# Altium PCB TxPower.PcbDoc
Units mil, origin at the board's own origin, x right, y up, seen from the top; angles counter-clockwise.
Board outline 3750 x 1650 mil, 2 copper layers (Top Layer, Bottom Layer); 31 components, 32 nets, 105 pads, 8 vias.
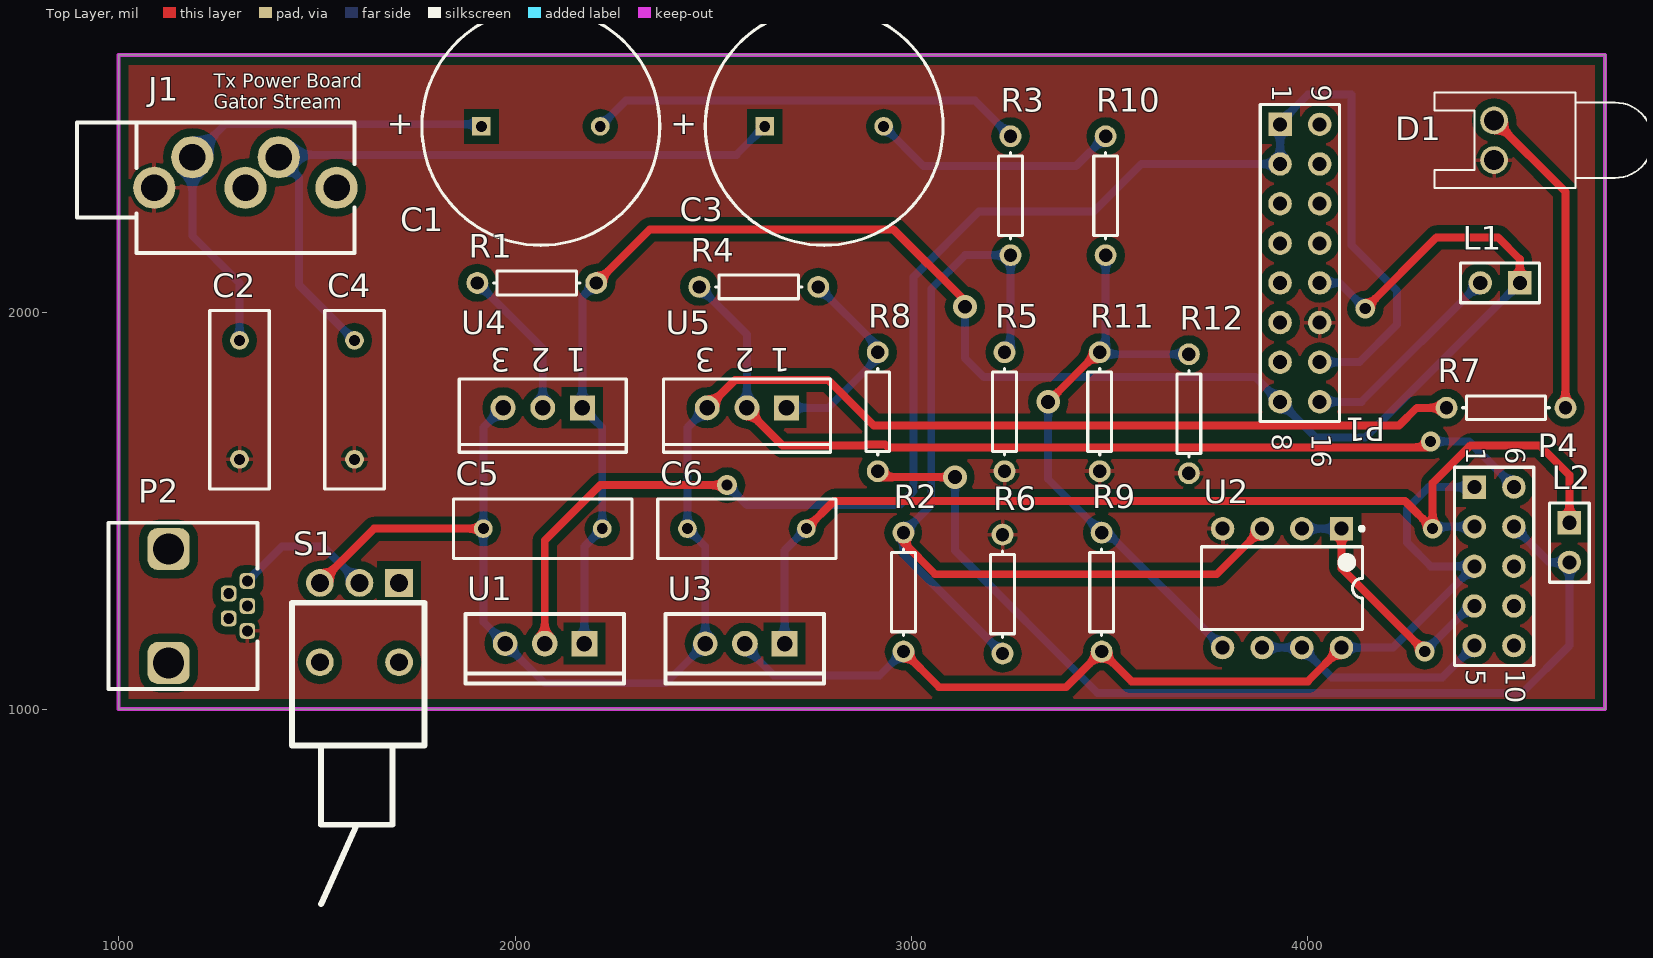
[diagram p0: Top Layer view]
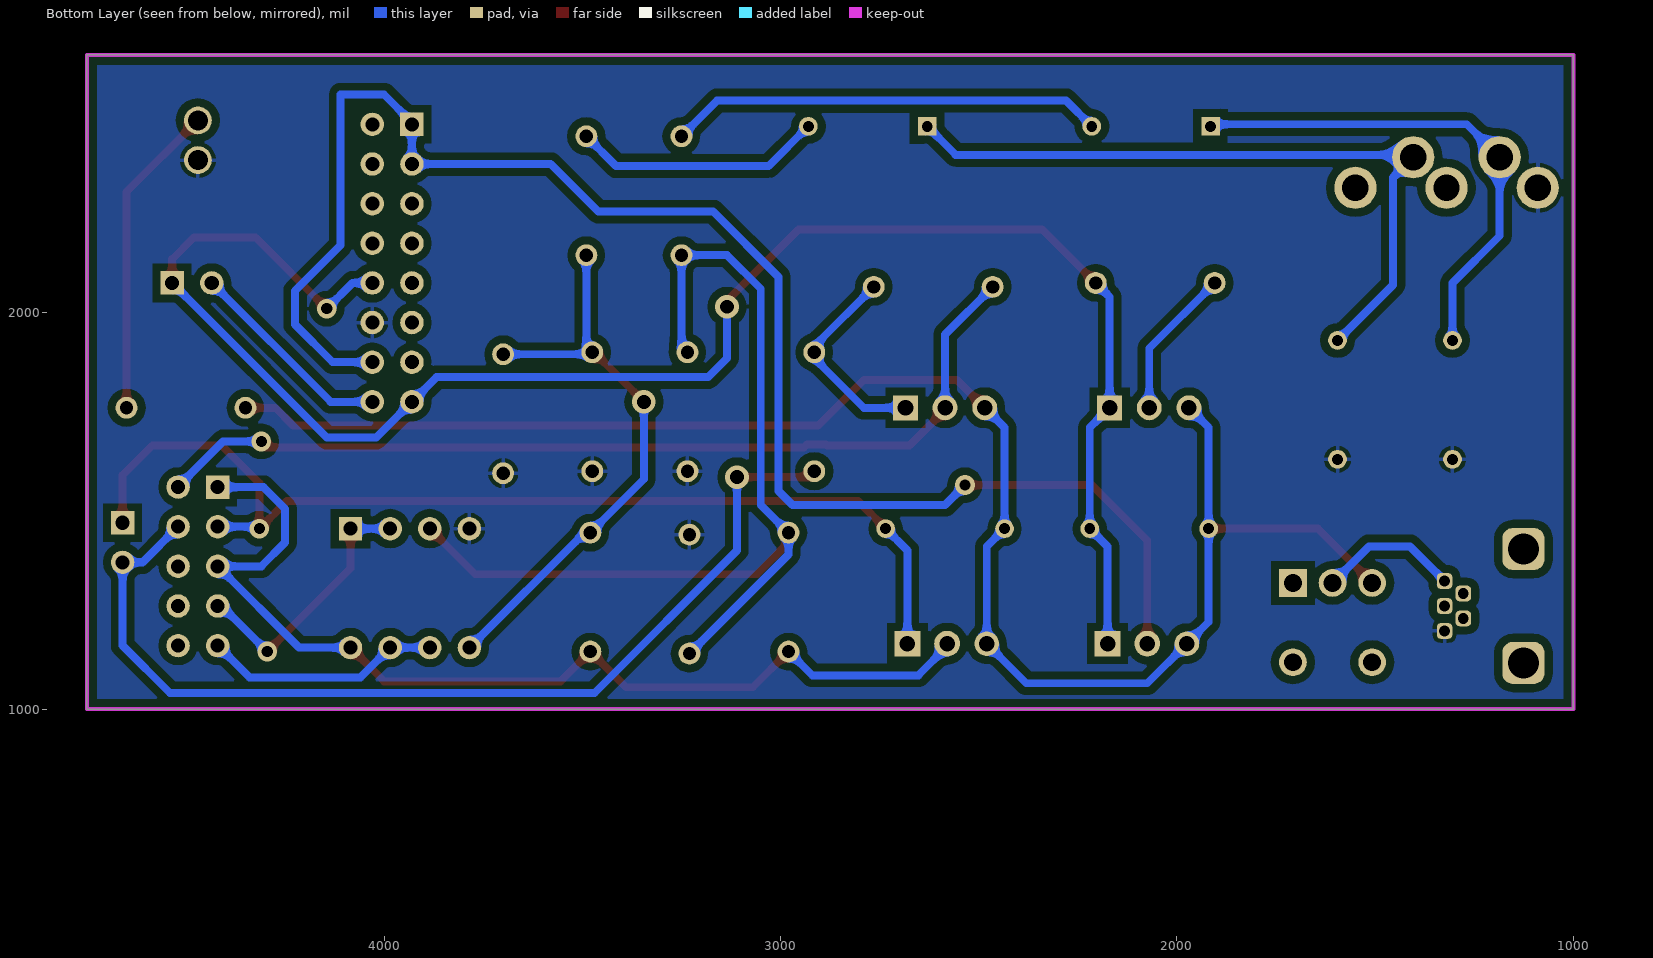
[diagram p1: Bottom Layer view, seen from below]

## Layer stack, top to bottom
Top Solder: solder mask 0.4, Solder Resist, Dk 3.5
Top Layer: signal copper 1.4
Dielectric 1: dielectric 12.6, FR-4, Dk 4.8
Bottom Layer: signal copper 1.4
Bottom Solder: solder mask 0.4, Solder Resist, Dk 3.5

## Board outline
1000,1000 1000,2650 4750,2650 4750,1000

## Design rules (kind name [scope] priority, off if disabled: settings)
Clearance [All] p1: gap=20
PolygonConnect [All] p1: connectstyle=Relief reliefconductorwidth=10 reliefentries=4 polygonreliefangle="90 Angle" airgapwidth=10
RoutingVias [All] p1: holewidth=28 width=50 viastyle="Through Hole" minholewidth=28 minwidth=50 maxholewidth=28 maxwidth=50
SolderMaskExpansion [All] p1: expansion=4
Width [All] p1: maxlimit=20 minlimit=20 preferedwidth=20
30 further rules are at their usual default settings.

## Components (designator, comment, footprint, x,y, rotation, side; value= is the part's Value field where it differs from the comment)
C1 "Cap Pol1" RB7.6-15 2065,2470 r180 top
C2 "Cap" RAD-0.3 1305,1780 r90 top
C3 "Cap Pol1" RB7.6-15 2780,2470 r180 top
C4 "Cap" RAD-0.3 1595,1780 r90 top
C5 "Cap" RAD-0.3 2070,1455 r180 top
C6 "Cap" RAD-0.3 2585,1455 r180 top
D1 "LED0" LED-0 4470,2435 r90 top
J1 "3.5mm jack GM" "3.5mm jack GM" 1090,2315 r270 top
L1 "Inductor" HDR1X2 4535,2075 r180 top
L2 "Inductor" HDR1X2 4660,1470 r270 top
P1 "Header 8X2A" HDR2X8_CEN 3930,2475 r270 top
P2 "USB B mini TH" "USB B mini Molex" 1325,1260 r90 top
P4 "Header 5X2A" HDR2X5_CEN 4420,1560 r270 top
R1 "Res1" AXIAL-0.3 2055,2075 r0 top
R2 "Res1" AXIAL-0.3 2980,1295 r270 top
R3 "Res1" AXIAL-0.3 3250,2295 r270 top
R4 "Res1" AXIAL-0.3 2615,2065 r180 top
R5 "Res1" AXIAL-0.3 3235,1750 r90 top
R6 "Res1" AXIAL-0.3 3230,1290 r270 top
R7 "Res1" AXIAL-0.3 4500,1760 r180 top
R8 "Res1" AXIAL-0.3 2915,1750 r90 top
R9 "Res1" AXIAL-0.3 3480,1295 r270 top
R10 "Res1" AXIAL-0.3 3490,2295 r270 top
R11 "Res1" AXIAL-0.3 3475,1750 r90 top
R12 "Res1" AXIAL-0.3 3700,1745 r90 top
S1 "SW-SPDT" "SW DPST jameco" 1610,1320 r0 top
U1 "LT1086  3.3V" TO-220 1975,1165 r180 top
U2 "LT1632CN8" DIP-8 3935,1305 r270 top
U3 "LT1086  3.3V" TO-220 2480,1165 r180 top
U4 "LM317KC" KC03 2070,1760 r180 top
U5 "LM317KC" KC03 2585,1760 r180 top

## Footprints (in the part's own frame and the unit in brackets; to place one, negate y for a bottom-side part, rotate by r counter-clockwise, add the part's x,y. Pads: shape width x height; smd on the part's side, far side on the other; paste and mask are expansions set on the pad)
"3.5mm jack GM" [mil]
  round 106.5 hole 66.5: 1(0,0) 2(-77,96) 3(0,230) 4(-77,314) 5(0,460)
  silkscreen extent -165,-195 165,505
AXIAL-0.3 [mm] "Axial Device, Thru-Hole; 2 Leads; 0.3 in Pin Spacing"
  round 1.4 hole 0.85: 1(-3.81,0) 2(3.81,0)
  silkscreen extent -2.77,-0.76 2.77,0.76
DIP-8 [mm] "DIP; 8 Leads; Row Spacing 7.62 mm; Pitch 2.54 mm"
  rect 1.5x1.5 hole 0.9: 1(-3.81,3.81)
  round 1.5 hole 0.9: 2(-3.81,1.27) 3(-3.81,-1.27) 4(-3.81,-3.81) 5(3.81,-3.81) 6(3.81,-1.27) 7(3.81,1.27) 8(3.81,3.81)
  silkscreen extent -3.93,-5.15 2.65,5.24, body extent -3.6,-5.15 3.6,5.15, height 5.08
HDR1X2 [mm] "Connector; Header; 2 Position"
  rect 1.5x1.5 hole 0.9: 1(0,0)
  round 1.5 hole 0.9: 2(2.54,0)
  silkscreen extent -1.27,-1.27 3.81,1.27
HDR2X5_CEN [mm] "Connector; Header; 5x2 Position"
  rect 1.5x1.5 hole 0.9: 1(0,0)
  round 1.5 hole 0.9: 2(2.54,0) 3(5.08,0) 4(7.62,0) 5(10.16,0) 6(0,2.54) 7(2.54,2.54) 8(5.08,2.54) 9(7.62,2.54) 10(10.16,2.54)
  silkscreen extent -1.27,-1.27 11.43,3.81
HDR2X8_CEN [mm] "Connector; Header; 8x2 Position"
  rect 1.5x1.5 hole 0.9: 1(0,0)
  round 1.5 hole 0.9: 2(2.54,0) 3(5.08,0) 4(7.62,0) 5(10.16,0) 6(12.7,0) 7(15.24,0) 8(17.78,0) 9(0,2.54) 10(2.54,2.54) 11(5.08,2.54) 12(7.62,2.54) 13(10.16,2.54) 14(12.7,2.54) 15(15.24,2.54) 16(17.78,2.54)
  silkscreen extent -1.27,-1.27 19.05,3.81
KC03 [mm] "TO, Thru-Hole, Vertical, Heatsink Mounted; 3 In-Line Leads; Pitch 2.54 mm"
  rect 1.6x1.6 hole 1: 1(-2.54,0)
  round 1.6 hole 1: 2(0,0) 3(2.54,0)
  silkscreen extent -5.35,-1.85 5.35,2.85
LED-0 [mil] "LED; 2 Leads"
  round 70 hole 50: 1(50,0) 2(-50,0)
  silkscreen extent -120,-400 120,150
RAD-0.3 [mm] "Radial Cap, Thru-Hole; 2 Leads; 0.3 in Pin Spacing"
  round 1.2 hole 0.7: 1(-3.81,0) 2(3.81,0)
  silkscreen extent -5.71,-1.91 5.71,1.91
RB7.6-15 [mm] "Polarized Capacitor (Radial); 2 Leads"
  rect 1.2x1.2 hole 0.7: 1(3.81,0)
  round 1.2 hole 0.7: 2(-3.81,0)
  silkscreen extent -7.62,-7.62 7.62,7.62
"SW DPST jameco" [mil]
  rect 70x70 hole 45: 1(97.64,-1.89)
  round 70 hole 45: 2(-2.36,-1.89) 3(-102.36,-1.89) 4(-102.36,-201.89) 5(97.64,-201.89)
  silkscreen extent -172,-812 162,-52
TO-220 [mil]
  rect 65x65 hole 39.4: 1(-200,0)
  round 65 hole 39.4: 2(-100,0)
  round 62 hole 39.4: 3(0,0)
  silkscreen extent -300,-75 100,100
"USB B mini Molex" [mm]
  rrect50% 2.7x2.7 hole 2: 0(-3.65,5.05) 0(3.65,5.05)
  rrect50% 1x1 hole 0.7: 1(1.6,0) 2(0.8,1.2) 3(0,0) 4(-1.6,0) 5(-0.8,1.2)
  silkscreen extent -5.33,-0.64 5.33,8.89

## Part data
C1 C3: "Polarized Capacitor (Radial)"
C2 C4 C5 C6: "Capacitor"
D1: "Typical INFRARED GaAs LED"
P1: "Header, 8-Pin, Dual row"
P4: "Header, 5-Pin, Dual row"
R1 R2 R3 R4 R5 R6 R7 R8 R9 R10 R11 R12: "Resistor"
S1: "SPDT Subminiature Toggle Switch, Right Angle Mounting, Vertical Actuation"
U2: "45MHz, 45V/µs, Dual Rail-to-Rail Input and Output Precision Operational Amplifier"
U4 U5: "3-Terminal Adjustable Regulator"

## Via types
v1: diameter 50, hole 28, Top Layer to Bottom Layer, 5 vias
v2: diameter 60, hole 35, Top Layer to Bottom Layer, 3 vias

## Nets (pads, with @x,y where several pads share a name; then routed paths per layer and width w, separated by ;. In a path a pad name is that pad's centre, name@x,y a point inside that pad or via, vN(x,y) a via of type N, cw(c..) or ccw(c..) an arc to the next point about the centre after c; other vN are vias at no path point)
5V: P2.1 S1.2 | length 356.7
  Bottom Layer w20: P2.1 1412.01,1410 1515.75,1410 S1.2
ADC_AVDD: P4.1 P4.3 R2.2 R9.2 U2.8 U3.2 | length 2600.7
  Top Layer w20: R2.2 3070,1055 3390,1055 R9.2 3555,1070 4000,1070 U2.8
  Bottom Layer w20: U3.2 2580,1157.57 2652.57,1085 2920,1085 R2.2 ; U2.8 4215,1155 P4.3 4310,1360 4250,1420 4250,1505 4305,1560 P4.1
ADC_DVDD: P4.6 R4.2 U5.2 | length 2391.1
  Top Layer w20: U5.2 2585,1754.58 2674.58,1665 2883.6,1665 2886.16,1667.56 2933.84,1667.56 2941.4,1660 4295,1660 v1(4310,1675)
  Bottom Layer w20: R4.2 2585,1945 U5.2 ; v1(4310,1675) 4406.48,1675 4520,1561.48 P4.6
ADC_GPIO: P4.8
ADC_MCLK: P4.9
AUDIO_L: P4.4 U2.1 U2.2 | length 683.8
  Top Layer w20: U2.1 4085,1355 v1(4295,1145)
  Bottom Layer w20: U2.2 U2.1 U2.1@4075,1465 ; v1(4295,1145) 4410,1260 P4.4
AUDIO_R: P4.5 U2.6 U2.7 | length 599.2
  Bottom Layer w20: U2.6 U2.7 4060,1080 4340,1080 P4.5
AVSS: C6.1 L2.1 P4.2 U3.1 | length 2708.3
  Top Layer w20: C6.1 2805,1525 4245,1525 v1(4315,1455) 4315,1570 4410,1665 4585,1665 4660,1590 L2.1
  Bottom Layer w20: U3.1 2680,1400 C6.1 ; v1(4315,1455) 4320,1460 P4.2
DSC_SD_CS: P1.12
DSC_SD_DIN: P1.7
DSC_SD_DOUT: P1.10
DSC_SD_PRESENT: P1.11
DSC_SD_SCLK: P1.9
DVSS: L2.2 P4.7 R8.1 | length 2522.3
  Top Layer w20: R8.1 2930,1585 v2(3110,1585)
  Bottom Layer w20: v2(3110,1585) 3110,1400 3470,1040 4540,1040 4660,1160 L2.2 4610,1370 P4.7
GND: C2.1 C4.1 D1.2 J1.1 P1.14 P2.4 R5.1 R6.1 R11.1 R12.1 U2.4
NetC1_1: C1.1 C2.2 J1.2 | length 1276.9
  Bottom Layer w20: C2.2 1305,2075 1186,2194 J1.2 1269.25,2475.25 1909.75,2475.25 C1.1
NetC1_2: C1.2 R3.1 | length 1099.2
  Bottom Layer w20: C1.2 2280,2535 3160,2535 R3.1
NetC3_1: C3.1 C4.2 J1.4 | length 1803.1
  Bottom Layer w20: C4.2 1455,2070 1455,2341 J1.4 1404,2398.25 2558.25,2398.25 C3.1
NetC3_2: C3.2 R10.1 | length 632.5
  Bottom Layer w20: C3.2 3030,2370 3415,2370 R10.1
NetD1_1: D1.1 R7.1 | length 799.6
  Top Layer w20: D1.1 4650,2305 R7.1
NetR1_1: R1.1 U4.2 | length 383.3
  Bottom Layer w20: R1.1 2070,1910 U4.2
NetR2_1: R2.1 R3.2 R5.2 R6.2 U2.3 | length 2549.7
  Top Layer w20: R2.1 2980,1420 3060,1340 3770,1340 U2.3
  Bottom Layer w20: R6.2 2980,1390 R2.1 3050,1515 3050,2060 3135,2145 R3.2 3250,1915 R5.2
NetR4_1: R4.1 R8.2 U5.1 | length 519.8
  Bottom Layer w20: U5.1 2790,1760 2910,1880 2910,1920 R4.1
NetR9_1: R9.1 R10.2 R11.2 R12.2 U2.5 | length 1464
  Top Layer w20: v2(3345,1775) 3470,1900 R11.2
  Bottom Layer w20: v2(3345,1775) 3345,1580 R9.1 3495,1445 U2.5 ; R11.2 3490,1915 R10.2 ; R11.2@3480,1895 R12.2
TMS_GND: C5.1 L1.1 P1.8 P1.13 R1.2 U1.1 U4.1 | length 4503
  Top Layer w20: R1.2 2340,2210 2955,2210 3135,2030 v2(3135,2015) ; v1(4145,2010) 4325,2190 4480,2190 4535,2135 L1.1
  Bottom Layer w20: U1.1 2175,1410 C5.1 2220,1710 U4.1 2170,2040 R1.2 ; v2(3135,2015) 3135,1885 3182.56,1837.44 3867.56,1837.44 P1.8 4020,1685 4145,1685 L1.1 ; P1.13 4080,2075 v1(4145,2010)
TMS_VDDA: P1.1 P1.2 P1.15 U1.2 | length 4042.2
  Top Layer w20: U1.2 2075,1425 2215,1565 v1(2535,1565)
  Bottom Layer w20: v1(2535,1565) 2585,1515 2970,1515 3005,1550 3005,2090 3170,2255 3460,2255 3580,2375 P1.2 P1.1 3930,2480 4000,2550 4110,2550 4110,2170 4225,2055 4225,1970 4130,1875 P1.15
TMS_VSSA: L1.2 P1.16 | length 529.3
  Bottom Layer w20: P1.16 4135,1775 L1.2
UART_DSC_MSP_IN: P1.6
UART_DSC_MSP_OUT: P1.5
UART_DSC_XBEE_IN: P1.4
UART_DSC_XBEE_OUT: P1.3
VCC: C5.2 C6.2 R7.2 S1.3 U1.3 U3.3 U4.3 U5.3 | length 4290
  Top Layer w20: S1.3 1644.53,1455 C5.2 ; U5.3 2555,1830 2790,1830 2905,1715 4230,1715 4275,1760 R7.2
  Bottom Layer w20: U4.3 1920,1710 C5.2 1920,1220 U1.3 2075,1065 2380,1065 U3.3 2480,1410 C6.2 2435,1710 U5.3
pads on no net: J1.3 J1.5 P2.0 P2.2 P2.3 P2.5 P4.10 S1.1 S1.4 S1.5

## Polygon pours and split planes (outlines as drawn)
GND on Bottom Layer "Bottom Layer-GND" (solid, pour order 4): 1000,1000 1000,2650 4750,2650 4750,1000
GND on Top Layer "Top Layer-GND" (solid, pour order 6): 1000,1000 1000,2650 4750,2650 4750,1000 1000,1000

## Keep-outs
Keep-Out Layer:
  the board outline again, w10

## Silkscreen, mask and mechanical layers (free items; w line width, h text height)
Top Overlay:
  text "Tx Power Board / Gator Stream" at 1240,2515 h35

## Text inside footprints (layer, text, board x,y; h text height)
C1: Top Overlay "+" at 1744.85,2499.01 h59.06 r180
C3: Top Overlay "+" at 2459.85,2499.01 h59.06 r180
P1: Top Overlay "9" at 4010,2575 h50 r270; Top Overlay "1" at 3910,2575 h50 r270; Top Overlay "8" at 3910,1695 h50 r270; Top Overlay "16" at 4010,1695 h50 r270
P4: Top Overlay "1" at 4400,1660 h50 r270; Top Overlay "5" at 4400,1100 h50 r270; Top Overlay "10" at 4500,1100 h50 r270; Top Overlay "6" at 4500,1660 h50 r270
U4: Top Overlay "3" at 1989.68,1910.59 h59.06 r180; Top Overlay "1" at 2179.84,1910.59 h59.06 r180; Top Overlay "2" at 2089.68,1910.59 h59.06 r180
U5: Top Overlay "3" at 2504.68,1910.59 h59.06 r180; Top Overlay "1" at 2694.84,1910.59 h59.06 r180; Top Overlay "2" at 2604.68,1910.59 h59.06 r180